# EAGLE board untitledfonte2 (EAGLE 6.2)
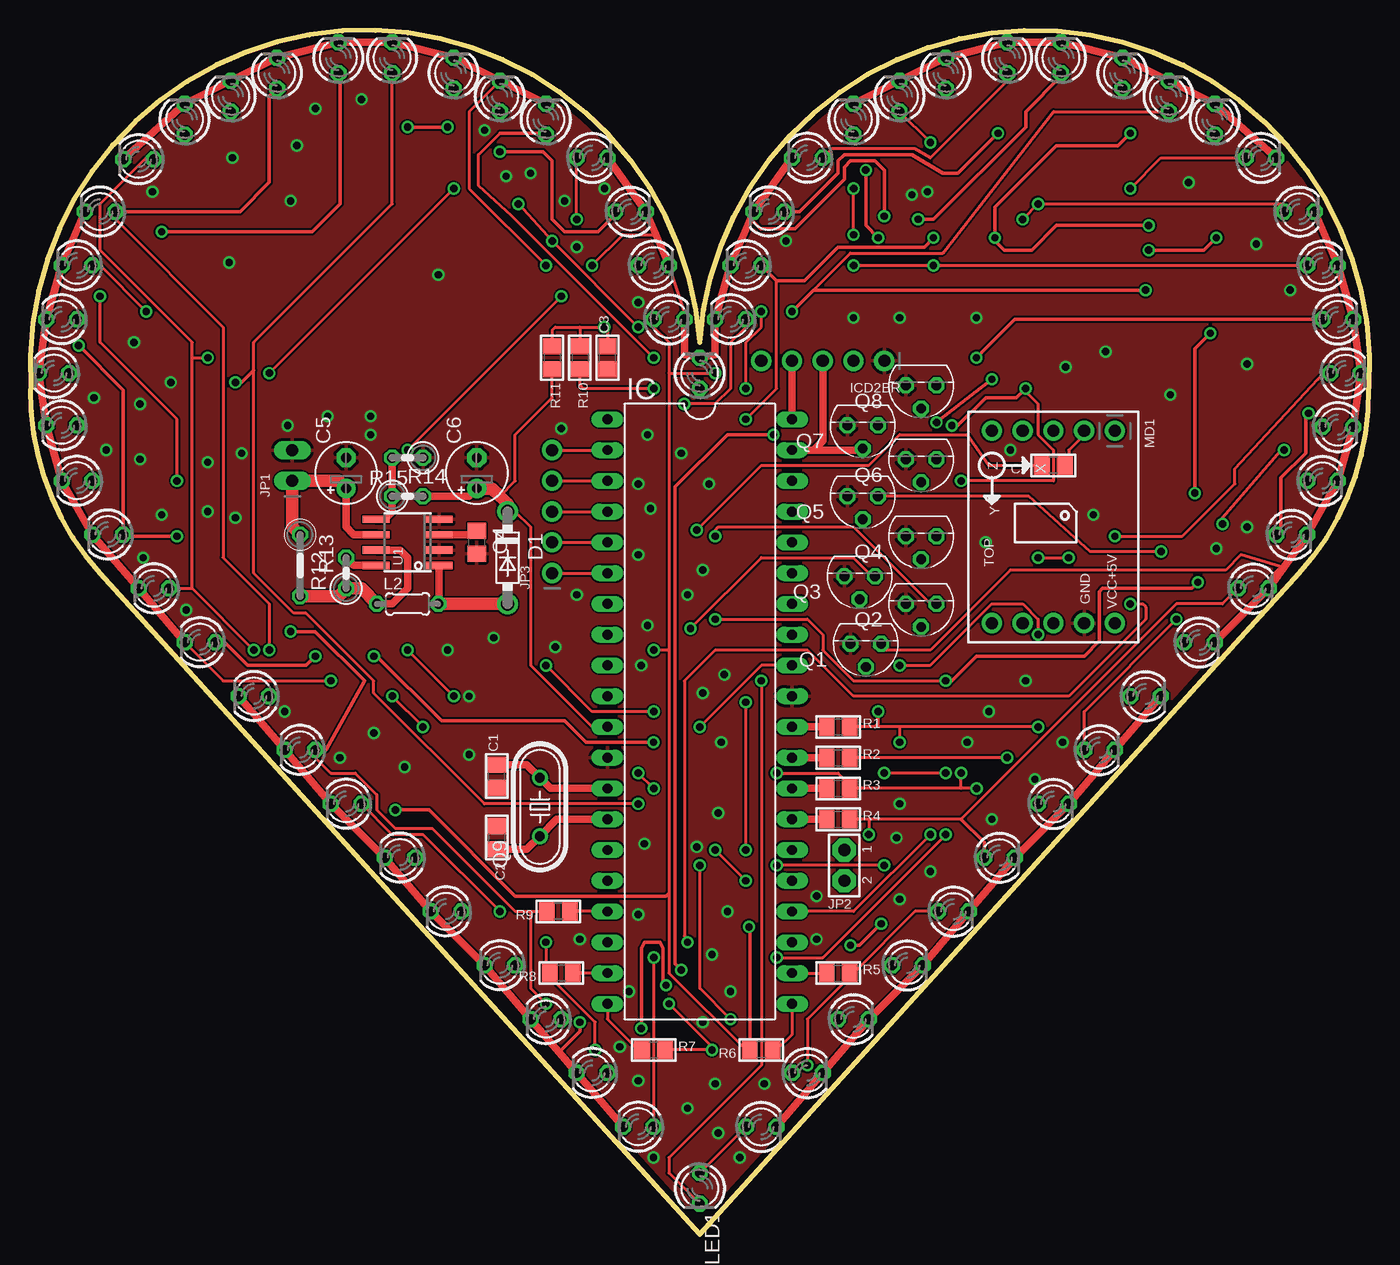
[diagram p0: board, top side]
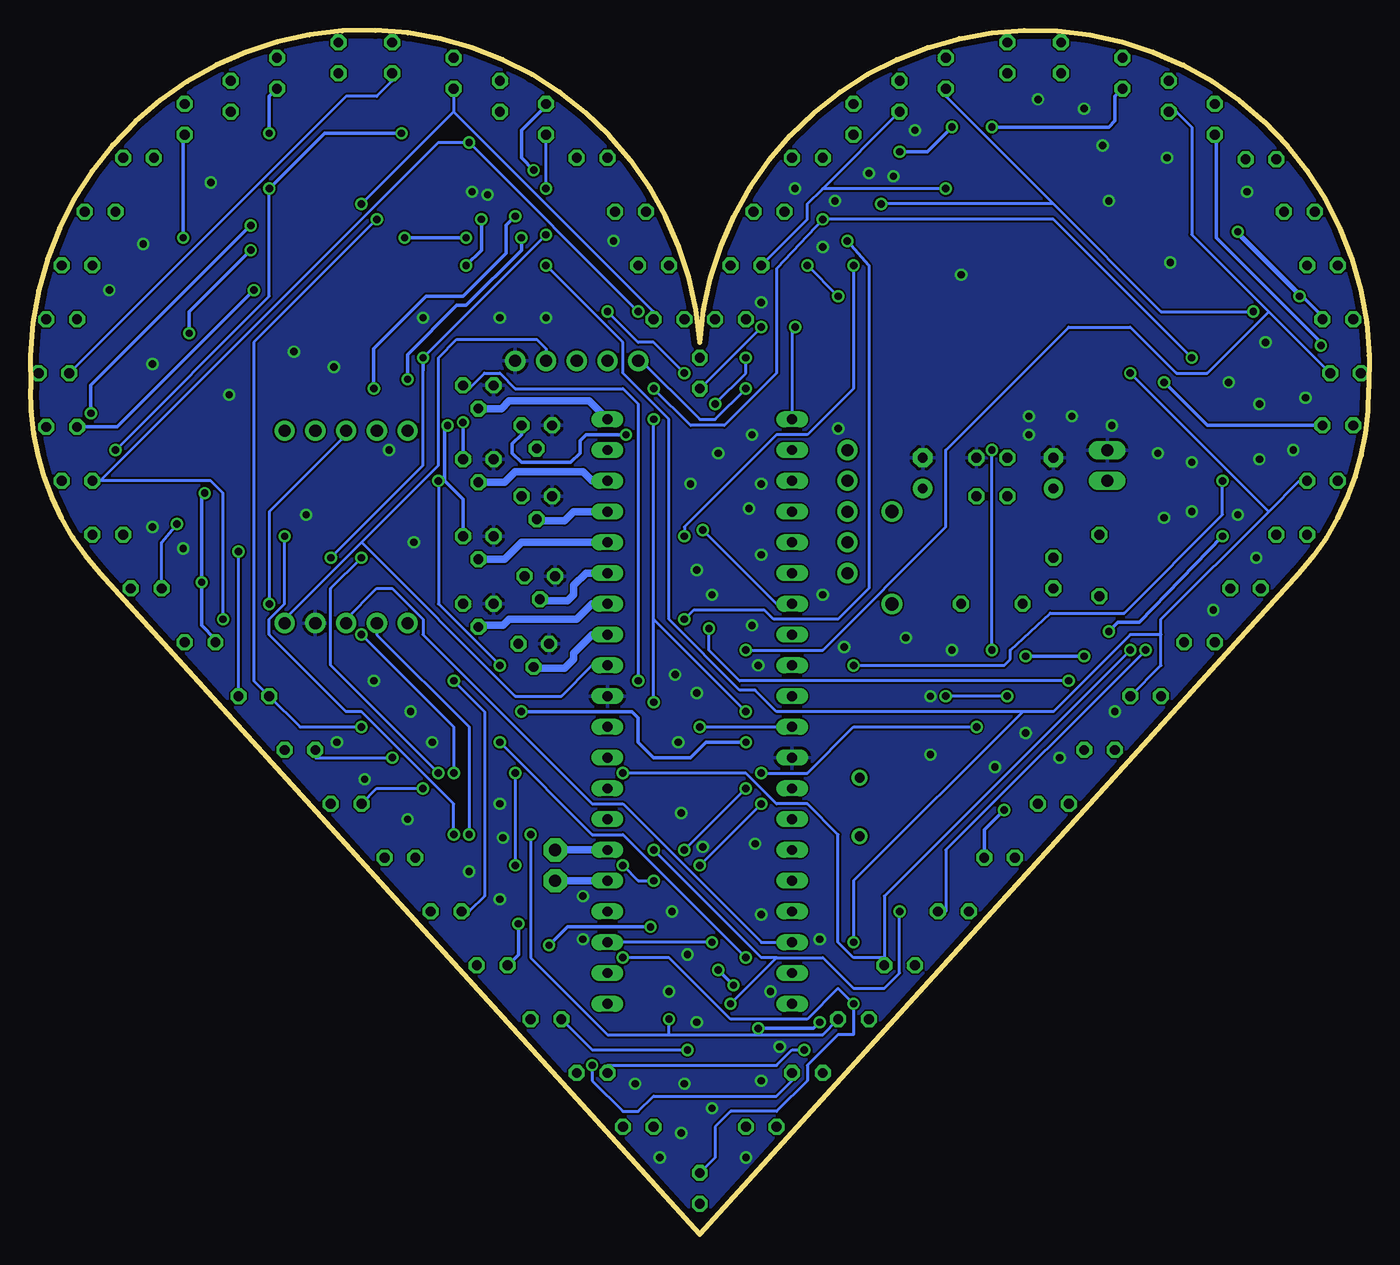
[diagram p1: board, bottom side, seen from below]

Size 110.6 x 99.43 mm. Coordinates in mm from the lower left corner, seen from the top.
Outline: 55.3,73.66 arc-180 110.54,69.85 arc-43 104.83,54.61 55.3,0 5.77,54.61 arc-43 0.05,69.85 arc-180 55.3,73.66
Copper layers (1*16): Top 0.035mm / dielectric 1.5mm / Bottom 0.035mm
Design rules: minimum track width 10mil, minimum drill 24mil, track to track 6mil, track to pad 6mil, pad to pad 6mil, via to via 6mil, smd to smd 8mil, copper to edge 20mil, drill to drill 8mil, minimum pad ring 10mil, minimum via ring 8mil, stop-mask expansion 4mil, vias tented up to drill 0mil, thermal gap 10mil

## Footprints (pad centres in the part's own frame; a part is rotated, then mirrored left to right if it is on the bottom)
0805_NOTHERMALS = smd 1.3 x 1.5: 1 -0.95,0; 2 0.95,0
C0805 = smd 1.3 x 1.5: 1 -0.95,0; 2 0.95,0
E2,5-5 = drill 0.813 pad 1.6: + -1.27,0 | drill 0.813 pad 1.6 octagon: - 1.27,0
DO41-7.6 = drill 1.1 pad 1.7: A 3.81,0; C -3.81,0
DIL40 = drill 0.813 long: 1 -24.13,-7.62; 2 -21.59,-7.62; 3 -19.05,-7.62; 4 -16.51,-7.62; 5 -13.97,-7.62; 6 -11.43,-7.62; 7 -8.89,-7.62; 8 -6.35,-7.62; 9 -3.81,-7.62; 10 -1.27,-7.62; 11 1.27,-7.62; 12 3.81,-7.62; 13 6.35,-7.62; 14 8.89,-7.62; 15 11.43,-7.62; 16 13.97,-7.62; 17 16.51,-7.62; 18 19.05,-7.62; 19 21.59,-7.62; 20 24.13,-7.62; 21 24.13,7.62; 22 21.59,7.62; 23 19.05,7.62; 24 16.51,7.62; 25 13.97,7.62; 26 11.43,7.62; 27 8.89,7.62; 28 6.35,7.62; 29 3.81,7.62; 30 1.27,7.62; 31 -1.27,7.62; 32 -3.81,7.62; 33 -6.35,7.62; 34 -8.89,7.62; 35 -11.43,7.62; 36 -13.97,7.62; 37 -16.51,7.62; 38 -19.05,7.62; 39 -21.59,7.62; 40 -24.13,7.62
1X05_ROUND = drill 1 pad 1.676: 1 -5.08,0; 2 -2.54,0; 3 0,0; 4 2.54,0; 5 5.08,0
1X02_OVAL = drill 1 long: 1 -1.27,0; 2 1.27,0
JUMPER2 = drill 1 pad 1.93 octagon: 1 2.54,0; 2 0,0
0204/5 = drill 0.813 octagon: 1 -2.54,0; 2 2.54,0
LED3MM = drill 0.813 octagon: A -1.27,0; K 1.27,0
MODULO_ADXL345 = drill 1 pad 1.676: 1 -7.938,5.08; 2 -7.938,2.54; 3 -7.938,0; 4 -7.938,-2.54; 5 -7.938,-5.08; 6 7.938,-5.08; 7 7.938,-2.54; 8 7.938,0; 9 7.938,2.54; 10 7.938,5.08
TO92 = drill 0.813 octagon: 1 1.27,0; 2 0,1.905; 3 -1.27,0
HC49/S = drill 0.813: 1 -2.413,0; 2 2.413,0
0207/5V = drill 0.813 octagon: 1 -2.54,0; 2 2.54,0
0207/2V = drill 0.813 octagon: 1 -1.27,0; 2 1.27,0
SOIC8_150MIL = smd 0.6 x 2.2: 1 -1.905,-2.6; 2 -0.635,-2.6; 3 0.635,-2.6; 4 1.905,-2.6; 5 1.905,2.6; 6 0.635,2.6; 7 -0.635,2.6; 8 -1.905,2.6

## Placement (x,y rotation side)
C1  22pF  [0805_NOTHERMALS]  38.53,37.85 90 top
C2  22pF  [0805_NOTHERMALS]  38.53,32.77 270 top
C3  100nF  [0805_NOTHERMALS]  47.68,72.39 90 top
C4  470pF  [C0805]  36.88,57.15 270 top
C5  100uF  [E2,5-5]  26.09,62.87 90 top
C6  120uF  [E2,5-5]  36.88,62.87 90 top
C7  [0805_NOTHERMALS]  84.51,63.5 180 top
D1  1N5819-B  [DO41-7.6]  39.42,55.88 270 top
IC  PIC16F877P  [DIL40]  55.3,43.18 270 top
ICD2BR  [1X05_ROUND]  65.46,72.14 180 top
JP1  [1X02_OVAL]  21.64,63.5 90 top
JP2  [JUMPER2]  67.24,29.21 90 top
JP3  [1X05_ROUND]  43.11,59.69 90 top
L2  62uH  [0204/5]  31.17,52.07 0 top
LED1  [LED3MM]  55.3,3.81 270 top
LED2  [LED3MM]  50.22,8.89 180 top
LED3  [LED3MM]  75.62,95.89 90 top
LED4  [LED3MM]  92.13,44.45 0 top
LED5  [LED3MM]  57.84,75.56 180 top
LED6  [LED3MM]  14.02,48.89 180 top
LED7  [LED3MM]  42.6,92.08 90 top
LED8  [LED3MM]  104.83,84.45 0 top
LED9  [LED3MM]  64.19,88.9 180 top
LED10  [LED3MM]  51.49,80.01 0 top
LED11  [LED3MM]  59.11,80.01 180 top
LED12  [LED3MM]  52.76,75.56 0 top
LED13  [LED3MM]  55.3,71.12 90 top
LED14  [LED3MM]  61.01,84.45 180 top
LED15  [LED3MM]  49.58,84.45 0 top
LED16  [LED3MM]  46.41,88.9 0 top
LED25  [LED3MM]  6.4,57.78 180 top
LED26  [LED3MM]  3.86,62.23 180 top
LED27  [LED3MM]  2.59,75.56 180 top
LED28  [LED3MM]  1.96,71.12 180 top
LED29  [LED3MM]  3.86,80.01 180 top
LED30  [LED3MM]  2.59,66.8 180 top
LED31  [LED3MM]  5.77,84.45 180 top
LED32  [LED3MM]  10.21,53.34 180 top
LED33  [LED3MM]  22.28,40 180 top
LED34  [LED3MM]  18.47,44.45 180 top
LED35  [LED3MM]  26.09,35.56 180 top
LED36  [LED3MM]  30.53,31.11 180 top
LED37  [LED3MM]  46.41,13.34 180 top
LED38  [LED3MM]  42.6,17.78 180 top
LED39  [LED3MM]  38.79,22.23 180 top
LED40  [LED3MM]  34.34,26.67 180 top
LED41  [LED3MM]  12.75,92.08 90 top
LED42  [LED3MM]  38.79,93.98 90 top
LED43  [LED3MM]  25.45,97.16 90 top
LED44  [LED3MM]  16.56,93.98 90 top
LED45  [LED3MM]  34.98,95.89 90 top
LED46  [LED3MM]  29.9,97.16 90 top
LED47  [LED3MM]  20.37,95.89 90 top
LED48  [LED3MM]  8.94,88.77 180 top
LED49  [LED3MM]  80.7,97.15 90 top
LED50  [LED3MM]  85.14,97.15 90 top
LED51  [LED3MM]  90.22,95.89 90 top
LED52  [LED3MM]  94.03,93.98 90 top
LED53  [LED3MM]  97.84,92.08 90 top
LED54  [LED3MM]  101.65,88.9 0 top
LED55  [LED3MM]  68,92.08 90 top
LED56  [LED3MM]  71.81,93.98 90 top
LED57  [LED3MM]  108.64,71.12 0 top
LED58  [LED3MM]  106.73,80.01 0 top
LED59  [LED3MM]  104.19,57.78 0 top
LED60  [LED3MM]  108,66.67 0 top
LED61  [LED3MM]  96.57,48.89 0 top
LED62  [LED3MM]  101.02,53.34 0 top
LED63  [LED3MM]  108,75.56 0 top
LED64  [LED3MM]  106.73,62.23 0 top
LED65  [LED3MM]  60.38,8.89 0 top
LED66  [LED3MM]  64.19,13.34 0 top
LED67  [LED3MM]  68,17.78 0 top
LED68  [LED3MM]  72.44,22.23 0 top
LED69  [LED3MM]  76.25,26.67 0 top
LED70  [LED3MM]  80.06,31.11 0 top
LED71  [LED3MM]  84.51,35.56 0 top
LED72  [LED3MM]  88.32,40 0 top
MD1  MODULO_ADXL345  [MODULO_ADXL345]  84.51,58.42 270 top
Q1  BC337  [TO92]  69.01,48.77 180 top
Q2  BC337  [TO92]  73.59,52.07 180 top
Q3  BC337  [TO92]  68.51,54.36 180 top
Q4  BC337  [TO92]  73.59,57.66 180 top
Q5  BC337  [TO92]  68.76,60.96 180 top
Q6  BC337  [TO92]  73.59,64.01 180 top
Q7  BC337  [TO92]  68.76,66.8 180 top
Q8  BC337  [TO92]  73.59,70.1 180 top
Q9  12MHz  [HC49/S]  42.09,35.31 90 top
R1  150R  [0805_NOTHERMALS]  66.73,41.91 0 top
R2  150R  [0805_NOTHERMALS]  66.73,39.37 0 top
R3  150R  [0805_NOTHERMALS]  66.73,36.83 0 top
R4  150R  [0805_NOTHERMALS]  66.73,34.29 0 top
R5  150R  [0805_NOTHERMALS]  66.73,21.59 0 top
R6  150R  [0805_NOTHERMALS]  60.38,15.24 180 top
R7  150R  [0805_NOTHERMALS]  51.49,15.24 0 top
R8  150R  [0805_NOTHERMALS]  43.87,21.59 180 top
R9  150R  [0805_NOTHERMALS]  43.61,26.67 180 top
R10  220R  [0805_NOTHERMALS]  45.39,72.39 270 top
R11  10k  [0805_NOTHERMALS]  43.11,72.39 270 top
R12  0R68  [0207/5V]  22.28,55.24 270 top
R13  68R  [0207/2V]  26.09,54.61 90 top
R14  10k  [0207/2V]  31.17,60.96 0 top
R15  3k  [0207/2V]  31.17,64.14 180 top
U1  [SOIC8_150MIL]  31.17,57.15 90 top

## Library data of the parts
C1-C3 C7 ICD2BR JP1-JP3 MD1 R1-R11 = junior
C4-C6 L2 R12-R15 = rcl
D1 = diode
IC = microchip; MF: MICROCHIP; MPN: PIC16F877-04/P; OC_FARNELL: 9761349; OC_NEWARK: 61K3463
LED1-LED16 LED25-LED72 = led
Q1-Q8 = transistor-npn
Q9 = crystal; OC_FARNELL: 1667008; OC_NEWARK: unknown
U1 = microbuilder

## Nets
1: D1.A L2.2 U1.1
3: C4.1 U1.3
5: R14.1 R15.2 U1.5
7: L2.1 R12.2 R13.1 U1.7
8: R13.2 U1.8
+5V: C5.+ JP1.1 R12.1 U1.6
GND: C1.1 C2.1 C3.1 C4.2 C5.- C6.- IC.12 IC.31 ICD2BR.1 JP1.2 MD1.9 Q1.1 Q2.1 Q3.1 Q4.1 Q5.1 Q6.1 Q7.1 Q8.1 R15.1 U1.2 U1.4
N$1: LED1.K Q8.3
N$2: C7.1 MD1.2
N$3: LED4.K LED65.K LED66.K LED67.K LED68.K LED69.K LED70.K LED71.K LED72.K Q5.3
N$4: LED3.K LED49.K LED50.K LED51.K LED52.K LED53.K LED54.K LED55.K LED56.K Q6.3
N$5: LED8.K LED57.K LED58.K LED59.K LED60.K LED61.K LED62.K LED63.K LED64.K Q1.3
N$6: LED7.K LED41.K LED42.K LED43.K LED44.K LED45.K LED46.K LED47.K LED48.K Q2.3
N$7: LED1.A LED9.A LED25.A LED33.A LED41.A LED49.A LED57.A LED65.A R9.2
N$8: LED10.A LED26.A LED34.A LED42.A LED50.A LED58.A LED66.A R8.2
N$9: LED11.A LED27.A LED35.A LED43.A LED51.A LED59.A LED67.A R7.2
N$10: LED12.A LED28.A LED36.A LED44.A LED52.A LED60.A LED68.A R6.2
N$11: LED2.K LED33.K LED34.K LED35.K LED36.K LED37.K LED38.K LED39.K LED40.K Q7.3
N$12: LED13.A LED29.A LED37.A LED45.A LED53.A LED61.A LED69.A R5.2
N$13: LED14.A LED30.A LED38.A LED46.A LED54.A LED62.A LED70.A R4.2
N$14: LED5.K LED9.K LED10.K LED11.K LED12.K LED13.K LED14.K LED15.K LED16.K Q4.3
N$15: LED15.A LED31.A LED39.A LED47.A LED55.A LED63.A LED71.A R3.2
N$16: LED16.A LED32.A LED40.A LED48.A LED56.A LED64.A LED72.A R2.2
N$17: LED2.A LED3.A LED4.A LED5.A LED6.A LED7.A LED8.A R1.2
N$18: IC.2 JP3.5
N$19: IC.3 JP3.4
N$20: IC.4 JP3.3
N$22: IC.5 JP3.2
N$23: IC.6 JP3.1
N$33: LED6.K LED25.K LED26.K LED27.K LED28.K LED29.K LED30.K LED31.K LED32.K Q3.3
N$36: C1.2 IC.13 Q9.2
N$37: C2.2 IC.14 Q9.1
N$41: ICD2BR.5 R10.2
N$42: C3.2 IC.1 R10.1 R11.1
RB0: IC.33 Q1.2
RB1: IC.34 Q2.2
RB2: IC.35 Q3.2
RB3: IC.36 Q4.2
RB4: IC.37 Q5.2
RB5: IC.38 Q6.2
RB6: IC.39 ICD2BR.3 Q7.2
RB7: IC.40 ICD2BR.4 Q8.2
RC2: IC.17 R9.1
RD0: IC.19 R8.1
RD1: IC.20 R7.1
RD2: IC.21 R6.1
RD3: IC.22 R5.1
RD4: IC.27 R4.1
RD5: IC.28 R3.1
RD6: IC.29 R2.1
RD7: IC.30 R1.1
RX: IC.26 JP2.1
SCK: IC.18 MD1.8
SDI: IC.23 MD1.3
SDO: IC.24 MD1.7
SS: C7.2 IC.7
TX: IC.25 JP2.2
VDD: C6.+ D1.C IC.11 IC.32 ICD2BR.2 MD1.10 R11.2 R14.2

## Tracks (layer width: path | path; a pad name or v marks a point on that pad's centre or on a via)
1
  Top 0.61: U1.1 33.77,52.13 L2.2
  Top 1.016: L2.2 D1.A
3
  Top 0.61: U1.3 36.57,57.78 C4.1
5
  Top 0.61: R15.2 R14.1 29.9,59.69 29.26,59.05 U1.5
7
  Top 0.61: U1.7 30.53,56.51 31.17,55.88 31.17,53.34 29.9,52.07 L2.1
  Top 1.016: R12.2 25.45,52.7 R13.1 27.36,53.34 L2.1
8
  Top 0.61: U1.8 26.72,55.24 R13.2
+5V
  Top 0.61: U1.6 26.72,57.78 26.09,58.42 C5.+
  Top 1.016: R12.1 21.64,58.42 JP1.1 25.45,62.23 C5.+
GND  (via drill 0.6)
  other vias: 22.02,89.92 33.71,79.25 39.3,87.38 50.22,76.96 62.41,82.04 72.82,85.85 78.16,75.69 85.52,71.63 87.81,59.44 51.23,59.94 56.06,61.98 43.87,66.55 34.47,48.26 36.25,44.45 30.91,38.61 50.73,32.26 56.82,34.8 57.08,40.64 16.94,59.18 14.66,59.69 10.85,59.44 9.32,55.88 12.88,51.56 21.01,43.18 9.07,64.01 6.28,64.77 28.37,41.4 25.58,39.37 36.25,39.62 38.28,49.28 21.26,66.8 24.56,67.56 28.12,67.56 28.12,66.04 17.45,64.52 14.66,63.75 9.07,68.58 11.61,70.36 8.56,73.66 5.26,69.09 55.55,54.86 50.98,50.29 57.33,46.23 55.55,44.7 54.28,52.83 50.98,66.04 53.77,64.52 50.22,61.98 50.22,56.13 45.14,52.83 50.47,46.99 43.36,48.51 82.22,45.72 79.17,43.18 77.4,40.64 71.81,35.56 79.43,34.29 82.98,37.59 85.27,40.64 97.97,56.64 100.51,58.42 56.82,8.38 58.6,6.35 60.63,12.45 56.57,12.45 54.28,10.41 51.49,6.35 50.22,12.7 48.69,15.49 55.55,17.53 57.84,20.07 57.58,26.67 56.31,23.11 64.95,27.94 64.95,24.38 71.81,27.69 74.35,29.97 71.55,32.77 49.46,20.07 45.39,24.38 55.04,32 78.92,57.15 80.95,64.77 68,75.69 71.81,75.69 95.68,86.87 101.27,81.79 104.07,77.98 74.09,86.11 88.83,72.9 94.16,69.34 100.51,71.88 37.52,91.19 44.12,85.34 47.42,86.36 45.14,81.53 41.33,87.63 16.69,88.9 16.69,88.9 10.09,86.11 16.44,80.26 21.52,85.34 23.55,92.96 27.36,93.73 50.22,26.42
  pour Top: -1.85,102.87 112.45,101.6 112.45,-2.54 -1.85,-1.27
  pour Bottom: -1.85,102.87 112.45,101.6 112.45,-2.54 -1.85,-1.27
N$1  (via drill 0.61)
  Top 0.254: LED1.K 52.76,5.08 52.76,6.35 60.38,13.97 v60.38,45.72
  Bottom 0.254: v60.38,45.72 60.38,68.58 61.65,69.85 70.54,69.85 71.81,71.12 73.08,71.12 74.35,69.85 Q8.3
N$2
  Top 0.254: C7.1 85.78,63.25 85.78,64.77 87.05,66.04 MD1.2
N$3  (via drill 0.61)
  Top 0.254: Q5.3 82.48,60.96 87.56,56.39 v93.4,56.39
  Top 0.61: LED65.K LED66.K LED67.K LED68.K LED69.K LED70.K LED71.K LED72.K LED4.K
  Bottom 0.254: LED4.K v93.4,56.39
N$4  (via drill 0.6)
  Top 0.305: v69.01,87.88 69.01,83.31 v70.03,82.3 | v79.43,70.61 76.13,68.07 v74.86,67.06
  Top 0.61: LED54.K LED53.K LED52.K LED51.K LED50.K LED49.K LED3.K LED56.K LED55.K
  Bottom 0.305: LED55.K 68,93.22 70.03,91.19 70.03,88.9 v69.01,87.88 | v70.03,82.3 70.03,81.28 74.6,76.71 75.36,76.71 79.43,72.64 v79.43,70.61 | v74.86,67.06 Q6.3
N$5
  Top 0.254: LED62.K 102.29,54.1 103.3,55.12 100,56.13 98.73,54.86 80.95,54.86 74.35,48.26 70.54,48.26 Q1.3
  Top 0.61: LED61.K LED62.K LED59.K LED64.K LED60.K LED57.K LED63.K LED58.K LED8.K
N$6  (via drill 0.61)
  Top 0.254: v56.57,57.66 56.57,58.17 56.82,58.42 68,58.42 74.35,52.07 Q2.3 | v42.6,80.01 36.25,86.36 36.25,92.71 LED42.K
  Top 0.61: LED7.K LED42.K LED45.K LED46.K LED43.K LED47.K LED44.K LED41.K LED48.K
  Bottom 0.254: v56.57,57.66 56.57,58.42 48.95,66.04 46.41,66.04 42.6,69.85 v42.6,80.01
N$7  (via drill 0.6, 0.61)
  Top 0.254: LED9.A 66.22,89.66 73.08,89.66 74.35,88.9 80.7,95.25 LED49.A | LED65.A LED1.A | 41.33,26.67 40.06,26.67 33.2,33.53 30.15,33.53 28.63,35.05 28.63,36.32 26.85,38.1 24.82,38.1 23.55,39.37 LED33.A | 41.33,26.67 R9.2 | v42.6,19.05 41.33,20.32 41.33,26.67 | LED57.A 106.86,71.12 106.35,70.61 99.49,63.25 99.49,61.98 95.18,57.66 v89.59,57.66 | v75.62,33.02 65.46,22.86 v61.65,22.86
  Top 0.305: v3.99,73.41 7.67,69.72 LED25.A 7.8,57.66 v12.12,57.66 | LED33.A 24.44,40 27.61,45.72 23.55,49.78 v21.52,49.78
  Bottom 0.254: LED57.A 84.51,93.98 81.97,93.98 80.7,95.25 LED49.A | LED1.A 54.03,6.35 54.03,8.89 52.76,10.16 48.95,10.16 46.41,12.7 46.41,13.97 43.87,16.51 42.6,16.51 v42.6,19.05 43.87,20.32 46.41,17.78 52.76,17.78 57.84,22.86 v61.65,22.86 | v89.59,57.66 89.59,52.07 90.86,50.8 90.86,49.53 84.51,43.18 83.24,43.18 75.62,35.56 v75.62,33.02
  Bottom 0.305: v3.99,73.41 3.99,73.66 12.63,82.3 12.63,90.68 LED41.A | v21.52,49.78 20.75,50.55 18.98,50.55 v12.12,57.66
N$8  (via drill 0.6, 0.61)
  Top 0.254: v46.66,15.24 46.66,17.53 42.6,21.59 | v68,80.01 v74.6,80.01 | 74.86,80.01 LED58.A | v19.74,71.12 v34.98,86.36 | v42.6,24.13 42.6,21.59 | 42.6,21.59 R8.2
  Top 0.305: LED50.A 85.14,95.63 82.22,92.71 82.22,91.44 74.6,83.82 v73.33,83.82 | v74.6,80.01 74.86,80.01
  Bottom 0.254: v46.66,15.24 47.68,15.24 48.95,13.97 62.92,13.97 LED66.A | 45.14,86.36 46.41,85.09 46.41,83.82 LED10.A | 45.14,86.36 LED42.A | 8.31,59.69 17.2,50.8 17.2,49.53 | 8.31,59.69 5.77,62.23 LED26.A | 17.2,49.53 17.2,46.99 LED34.A | v68,80.01 61.65,73.66 61.65,71.12 57.84,67.31 57.84,50.8 52,44.96 50.73,44.96 48.95,43.18 28.63,43.18 | 28.63,43.18 26.09,43.18 19.74,49.53 17.2,49.53 | v34.98,86.36 45.14,86.36 | 8.31,59.69 v19.74,71.12 | v42.6,24.13 42.6,29.21 28.63,43.18
  Bottom 0.305: v73.33,83.82 73.33,81.28 v74.6,80.01
N$9  (via drill 0.6, 0.61)
  Top 0.254: R7.2 v56.31,15.24 56.57,15.24 v52.76,19.05 | LED35.A 29.9,33.02 32.44,33.02 v38.79,26.67 | 61.65,78.74 61.65,69.85 v59.11,67.31 | v59.11,31.75 v59.11,43.94 | v5.77,77.47 5.77,73.66 12.12,67.31 v12.12,62.23 | v42.6,46.99 46.41,43.18 v51.49,43.18
  Top 0.305: LED59.A 102.92,58.04 103.3,58.42 103.3,62.48 105.34,64.52 105.34,67.56 v105.59,67.82 | v92.38,83.31 84.76,83.31 82.73,81.28 80.44,81.28 79.68,82.04 v79.68,82.3 79.68,84.84 84.76,89.92 89.84,89.92 v90.86,90.93 | LED11.A 61.65,78.74 63.93,78.74 66.73,81.53 73.84,81.53 v74.6,82.3 | v10.85,82.8 23.29,82.8 25.58,85.09 25.58,95.76 LED43.A
  Bottom 0.254: v56.31,15.24 64.19,15.24 LED67.A | v38.79,26.67 38.79,21.59 40.06,20.32 42.6,20.32 45.14,22.86 48.95,22.86 | v52.76,19.05 48.95,22.86 | v59.11,43.94 59.11,50.8 | 59.11,50.8 v59.11,67.31 | v59.11,31.75 50.22,22.86 48.95,22.86 | v5.77,77.47 10.85,82.55 v10.85,82.8 | v12.12,62.23 12.12,59.44 20.25,51.31 26.34,51.31 29.64,48.26 29.64,47.5 30.15,46.99 v42.6,46.99 | 59.11,50.8 v51.49,43.18
  Bottom 0.305: v105.59,67.82 105.59,70.1 v92.38,83.31 | v90.86,90.93 90.86,93.98 LED51.A | v74.6,82.3 v79.68,82.3 | LED27.A 3.86,75.82 v10.85,82.8
N$10  (via drill 0.6, 0.61)
  Top 0.254: 52.76,71.12 52.76,73.66 51.49,74.93 LED12.A | 52.76,71.12 52.76,48.26 | 52.76,48.26 52.76,28.19 52.76,21.59 59.11,15.24 R6.2 | LED52.A 84.51,92.71 75.36,81.03 67.74,81.03 63.3,76.58 v62.92,76.2 | 52.76,71.12 v56.57,71.12 | 52.76,48.26 v51.49,48.26
  Top 0.305: v92.13,77.98 64.7,77.98 63.3,76.58 | R6.2 59.43,25.33 v59.36,25.4 | v67.74,23.88 68.51,23.88 v70.28,25.65 | v30.15,35.05 32.95,35.05 40.06,27.94 52.5,27.94 52.76,28.19
  Bottom 0.254: 8.31,76.2 14.66,82.55 14.66,91.44 15.93,92.71 LED44.A | 8.31,76.2 LED28.A | v62.92,76.2 60.38,73.66 59.11,73.66 v56.57,71.12 | 8.31,76.2 13.39,71.12 15.93,71.12 19.74,74.93 24.82,74.93 34.98,64.77 34.98,58.42 45.14,48.26 v51.49,48.26
  Bottom 0.305: LED60.A 103.43,66.67 v92.13,77.98 | v59.36,25.4 66.22,25.4 v67.74,23.88 | v70.28,25.65 70.28,23.11 LED68.A | LED36.A 31.8,33.4 v30.15,35.05
N$11  (via drill 0.6)
  Top 0.305: v61.39,66.04 57.58,66.04 53.27,61.72 53.27,22.35 v53.77,21.84 | v52.5,20.57 52.25,20.83 52.25,23.62 52,24.13 50.73,24.13 50.47,23.62 v50.47,17.02 | v45.39,17.53 45.39,16.79 43.66,15.06
  Top 0.61: LED34.K LED33.K LED35.K LED36.K LED40.K LED39.K LED38.K 43.66,15.06 LED37.K LED2.K
  Bottom 0.305: Q7.3 70.03,66.04 70.79,65.28 70.79,64.52 70.03,63.75 65.97,63.75 65.2,64.52 65.2,65.53 64.7,66.04 v61.39,66.04 | v53.77,21.84 v52.5,20.57 | v50.47,17.02 45.9,17.02 v45.39,17.53
N$12  (via drill 0.6, 0.61)
  Top 0.254: 68,21.59 73.08,26.67 LED69.A | v64.19,13.97 64.19,17.78 68,21.59 | 68,21.59 R5.2 | v9.58,76.2 5.77,80.01 LED29.A | v50.22,74.93 v43.11,82.04 v40.31,85.09 | v75.62,45.72 68,45.72 65.46,48.26 65.46,49.53 64.19,50.8 v56.57,50.8
  Top 0.305: v75.62,45.72 76.13,45.72 78.16,47.75 87.05,47.75 88.32,49.02 88.32,53.09 88.57,53.34 95.94,53.34 v96.45,53.85 | v96.19,61.21 96.19,73.15 v97.46,74.42 | v92.38,81.28 96.95,81.28 v97.97,82.3
  Bottom 0.254: v64.19,13.97 64.19,12.7 61.65,10.16 60.38,10.16 59.11,11.43 48.95,11.43 47.68,12.7 LED37.A | v9.58,76.2 17.2,76.2 26.09,85.09 | 26.09,85.09 34.98,93.98 LED45.A | v50.22,74.93 LED13.A | 26.09,85.09 v40.31,85.09 | v75.62,45.72 73.08,43.18 73.08,27.94 74.35,26.67 LED69.A | v56.57,50.8 55.81,51.56 49.96,51.56 49.2,50.8 43.87,50.8 41.33,53.34 41.33,80.01 v43.11,82.04
  Bottom 0.305: LED61.A 95.3,49.15 96.45,50.29 v96.45,53.85 96.45,60.96 v96.19,61.21 | v97.46,74.42 97.46,76.2 v92.38,81.28 | v97.97,82.3 97.97,90.68 LED53.A
N$13  (via drill 0.6, 0.61)
  Top 0.254: 69.27,34.29 76.89,34.29 94.67,52.07 98.48,52.07 LED62.A | 69.27,34.29 R4.2 | 69.27,34.29 v69.27,33.02 | LED46.A 29.9,85.09 18.47,73.66 18.47,71.37 18.47,54.61 21.77,51.31 22.79,51.31 28.37,45.72 28.37,44.7 37.52,35.56 v50.22,35.56 | v55.3,30.48 55.3,20.32 v57.84,17.78 | LED54.A 93.4,88.9 v90.86,86.36 | v103.56,64.77 103.3,64.77 98.48,59.18 v98.48,58.67 98.48,58.42
  Top 0.305: LED14.A 63.55,84.45 66.73,87.63 66.73,88.65 67.24,89.15 72.82,89.15 75.36,87.63 76.63,87.63 v79.94,90.93 | LED70.A 78.79,32.38 76.89,34.29 | v16.94,70.36 17.45,70.36 18.47,71.37
  Bottom 0.254: LED38.A 45.14,16.51 57.84,16.51 | 57.84,16.51 62.92,16.51 69.27,22.86 v69.27,33.02 | v55.3,30.48 v50.22,35.56 | 57.84,16.51 v57.84,17.78 | v90.86,86.36 90.86,77.47 v103.56,64.77 | v98.48,58.67 99.75,57.15 LED62.A
  Bottom 0.305: v79.94,90.93 86.29,90.93 v90.86,86.36 | LED30.A 13.39,66.8 v16.94,70.36
N$14  (via drill 0.6, 0.61)
  Top 0.254: LED10.K 54.03,76.2 LED12.K | v46.41,80.01 48.95,82.55 51.49,82.55 51.64,82.62 | v31.17,64.77 v43.87,77.47 | v34.98,44.45 v31.17,48.26 | v32.44,41.91 v29.9,44.45 | v51.49,36.83 v50.22,38.1 | v59.11,29.21 v56.57,31.75 | v70.54,30.48 v61.65,30.48 | v75.62,38.1 v70.54,38.1 | v83.24,49.53 83.24,50.8 81.97,52.07 79.43,52.07 74.35,46.99 v71.81,46.99 | v76.89,62.23 84.51,62.23 84.51,64.77 83.24,66.04 83.24,68.58 81.97,69.85 v82.22,69.85
  Top 0.305: v76.13,66.8 76.63,66.8 78.92,69.09 81.46,69.09 v82.22,69.85 | v70.54,84.07 70.54,87.88 69.78,88.65 67.74,88.65 67.24,88.14 67.24,87.12 63.17,83.06 60.31,83.06 59.49,83.87
  Top 0.61: LED9.K LED14.K LED11.K LED5.K 56.57,72.64 LED13.K 54.03,72.64 LED12.K | LED10.K 51.64,82.62 LED15.K LED16.K
  Bottom 0.254: v43.87,77.47 v46.41,80.01 | v31.17,48.26 v31.17,64.77 | v29.9,44.45 v34.98,44.45 | v32.44,41.91 42.6,41.91 46.41,38.1 v50.22,38.1 | v56.57,31.75 v51.49,36.83 | v59.11,29.21 60.38,29.21 v61.65,30.48 | v70.54,38.1 v70.54,30.48 | v75.62,38.1 75.62,41.91 v83.24,49.53 | v71.81,46.99 76.89,52.07 v76.89,62.23
  Bottom 0.305: Q4.3 74.86,60.71 76.38,62.23 76.38,66.55 v76.13,66.8 | v82.22,69.85 82.22,73.15 77.9,77.47 74.86,77.47 71.3,81.03 71.3,83.31 v70.54,84.07
N$15  (via drill 0.6, 0.61)
  Top 0.254: v78.16,36.83 76.89,36.83 | 76.89,36.83 68,36.83 | v68,82.55 v68,86.36 | v83.24,55.88 v85.78,55.88 | 76.89,36.83 v76.89,38.1 | v19.74,48.26 19.74,52.07 15.93,55.88 15.93,74.93 7.04,83.82 LED31.A | 68,36.83 66.73,38.1 v61.65,38.1 | 68,36.83 R3.2
  Top 0.305: LED63.A 81.33,75.56 v78.16,72.39 | LED31.A 17.33,84.45 19.74,86.87 19.74,93.98 LED47.A | LED15.A 48.31,84.2 46.92,82.8 44.12,82.8 43.11,83.82 43.11,88.65 42.34,89.41 v38.79,89.41 | v34.47,91.44 v31.17,91.44
  Bottom 0.254: v78.16,36.83 81.97,36.83 LED71.A | v68,86.36 LED55.A | v78.16,72.39 v68,82.55 | 78.16,71.37 78.16,63.5 v85.78,55.88 | v83.24,55.88 85.78,53.34 85.78,46.99 v76.89,38.1 | 40.06,22.86 40.06,27.94 v19.74,48.26 | v61.65,38.1 51.49,38.1 48.95,35.56 46.41,35.56 43.87,33.02 43.87,24.13 42.6,22.86 40.06,22.86 | 40.06,22.86 LED39.A
  Bottom 0.305: v78.16,72.39 78.16,71.37 | v38.79,89.41 36.5,89.41 v34.47,91.44 | v31.17,91.44 21.52,91.44 21.01,91.95 21.01,93.98 LED47.A
N$16  (via drill 0.61)
  Top 0.254: v80.7,39.37 R2.2 | v94.67,50.8 87.05,43.18 LED72.A | v74.35,90.17 LED56.A | 13.39,53.34 v18.47,48.26 | LED32.A 13.39,53.34 | 13.39,53.34 13.39,72.39 | 13.39,72.39 13.39,73.66 5.77,81.28 5.77,85.09 9.58,88.9 LED48.A | v45.14,83.82 LED16.A | 13.39,72.39 v14.66,72.39 | v60.38,76.2 60.38,74.93 59.11,73.66 v59.11,69.85
  Bottom 0.254: v80.7,39.37 87.05,39.37 LED72.A | v94.67,50.8 94.67,61.21 95.68,62.23 104.83,62.23 | 104.83,62.23 76.89,90.17 v74.35,90.17 v60.38,76.2 | 104.83,62.23 LED64.A | v18.47,48.26 34.98,31.75 34.98,26.67 LED40.A | v14.66,72.39 26.09,83.82 v45.14,83.82 48.95,79.76 48.95,71.12 53.27,66.8 56.06,66.8 v59.11,69.85
N$17  (via drill 0.6, 0.61)
  Top 0.254: v83.24,41.91 71.81,41.91 | 71.81,41.91 69.78,41.91 R1.2 | v51.49,22.86 LED2.A | 71.81,41.91 v71.81,40.64 | 38.79,90.93 37.01,89.15 37.01,86.61 39.8,84.07 v51.49,72.39 | v54.03,68.58 56.57,68.58 57.84,69.85 57.84,73.66 59.11,74.93 LED5.A | LED8.A 103.56,85.09 v83.24,85.09 v81.97,83.82
  Top 0.305: LED6.A 16.06,48.89 17.96,46.99 22.79,46.99 v23.55,47.75 | v51.49,40.64 45.9,40.64 44.12,42.42 33.96,42.42 28.63,47.75 v28.37,47.75 | v70.03,43.18 70.03,42.16 69.78,41.91 | 38.79,90.93 42.47,90.93 LED7.A
  Bottom 0.254: v83.24,41.91 88.32,41.91 LED4.A 92.13,45.72 92.13,73.66 v81.97,83.82 | v51.49,22.86 61.65,33.02 64.19,33.02 v71.81,40.64 | 75.62,92.71 59.11,76.2 LED5.A | LED3.A 75.62,92.71 | v51.49,72.39 51.49,71.12 v54.03,68.58 | 75.62,92.71 v83.24,85.09
  Bottom 0.305: v51.49,40.64 54.79,40.64 56.06,39.37 59.11,39.37 60.38,40.64 60.38,42.67 60.89,43.18 v70.03,43.18 | v23.55,47.75 v28.37,47.75
N$18
  Top 0.254: JP3.5 IC.2
N$19
  Top 0.254: JP3.4 IC.3
N$20
  Top 0.254: JP3.3 IC.4
N$22
  Top 0.254: JP3.2 IC.5
N$23
  Top 0.254: JP3.1 IC.6
N$33  (via drill 0.61)
  Top 0.254: v54.54,50.04 60.38,55.88 68,55.88 69.27,54.61 Q3.3 | v24.82,45.72 15.93,45.72 12.12,49.53 12.17,49.57
  Top 0.61: LED31.K LED29.K LED27.K LED28.K LED30.K LED26.K LED25.K LED32.K 12.17,49.57 LED6.K
  Bottom 0.254: v54.54,50.04 54.54,48.26 52,45.72 v24.82,45.72
N$36
  Top 0.61: IC.13 42.98,36.83 Q9.2 41.01,38.8 C1.2
N$37
  Top 0.61: C2.2 41.01,31.82 Q9.1 43.49,34.29 IC.14
N$41  (via drill 0.61)
  Top 0.254: v51.49,69.85 45.65,69.85 45.39,70.1 R10.2
  Bottom 0.254: v51.49,69.85 54.03,67.31 55.3,67.31 60.38,72.39 ICD2BR.5
N$42  (via drill 0.61)
  Top 0.254: 45.39,74.93 R10.1 | 45.39,74.93 43.36,74.93 43.11,74.68 R11.1 | 45.39,74.93 v47.42,74.93 47.68,74.68 C3.2
  Bottom 0.254: v47.42,74.93 47.68,74.68 IC.1
RB0
  Bottom 0.61: IC.33 64.19,49.53 65.71,48.01 65.71,47.5 66.47,46.74 68.89,46.74 Q1.2
RB1
  Bottom 0.61: IC.34 64.19,52.07 65.46,50.8 71.05,50.8 71.55,50.29 73.46,50.29 Q2.2
RB2
  Bottom 0.61: IC.35 64.7,54.61 65.71,53.59 65.71,52.83 66.22,52.32 68.38,52.32 Q3.2
RB3
  Bottom 0.61: Q4.2 71.43,55.75 70.03,57.15 IC.36
RB4
  Bottom 0.61: IC.37 65.71,59.69 66.47,58.93 68.63,58.93 Q5.2
RB5
  Bottom 0.61: Q6.2 71.43,62.1 70.54,62.99 64.95,62.99 64.19,62.23 IC.38
RB6
  Top 0.61: Q7.2 68.63,64.77 IC.39 64.7,64.77 65.46,65.53 ICD2BR.3
RB7
  Top 0.61: IC.40 ICD2BR.4
  Bottom 0.61: Q8.2 71.68,68.2 71.05,68.83 64.44,68.83 IC.40
RC2
  Top 0.254: IC.17 R9.1
RD0
  Top 0.254: IC.19 R8.1
RD1
  Top 0.254: IC.20 47.68,17.78 50.22,15.24 R7.1
RD2
  Top 0.254: IC.21 62.92,16.51 61.65,15.24 R6.1
RD3
  Top 0.254: IC.22 R5.1
RD4
  Top 0.61: R4.1 IC.27
RD5
  Top 0.61: R3.1 IC.28
RD6
  Top 0.61: R2.1 IC.29
RD7
  Top 0.61: R1.1 IC.30
RX
  Bottom 0.61: IC.26 JP2.1
SCK
  Bottom 0.254: IC.18 50.22,24.13 61.65,35.56 64.19,35.56 78.16,49.53 78.16,50.8 80.7,53.34 81.97,53.34 84.51,50.8 MD1.8
SDI  (via drill 0.61)
  Top 0.254: v54.28,24.13 54.03,24.64 54.03,45.72 56.57,48.26 64.19,48.26 68,44.45 85.78,44.45 92.13,50.8 92.13,51.82 91.87,52.07 v90.86,52.07
  Bottom 0.254: v54.28,24.13 IC.23 | v90.86,52.07 90.86,59.69 84.51,66.04 MD1.3
SDO  (via drill 0.61)
  Top 0.254: IC.24 68,26.67 v74.35,33.02
  Bottom 0.254: v74.35,33.02 74.35,41.91 81.97,49.53 MD1.7 81.97,50.8
SS  (via drill 0.61)
  Top 0.254: v55.04,58.17 60.38,63.5 69.27,63.5 71.81,66.04 77.4,66.04 79.17,63.5 C7.2
  Bottom 0.254: v55.04,58.17 48.95,52.07 IC.7
TX
  Bottom 0.61: IC.25 JP2.2
VDD  (via drill 0.61)
  Top 0.254: 38.79,60.96 40.06,62.23 40.06,66.04 43.11,69.09 R11.2 | IC.11 46.41,41.91 41.33,46.99 41.33,58.42 40.06,59.69 D1.C | v55.3,41.91 60.38,46.99 IC.32
  Top 0.61: R14.2 36.25,60.96 C6.+
  Top 1.016: D1.C 39.42,60.32 38.79,60.96 38.15,61.59 C6.+
  Bottom 0.254: IC.32 64.19,46.99 66.73,44.45 70.54,44.45 83.24,57.15 | 83.24,57.15 89.59,50.8 MD1.10 | ICD2BR.2 68,73.15 68.76,73.91 75.36,73.91 76.89,72.39 76.89,63.5 83.24,57.15 | v55.3,41.91 IC.11